# Altium PCB overlay dan masking.PcbDoc (part 2 of 3)
Units mil, origin at the board's own origin, x right, y up, seen from the top; angles counter-clockwise.
Board outline 6000 x 4000 mil, 2 copper layers (Top Layer, Bottom Layer); 120 components, 0 nets, 410 pads, 0 vias.
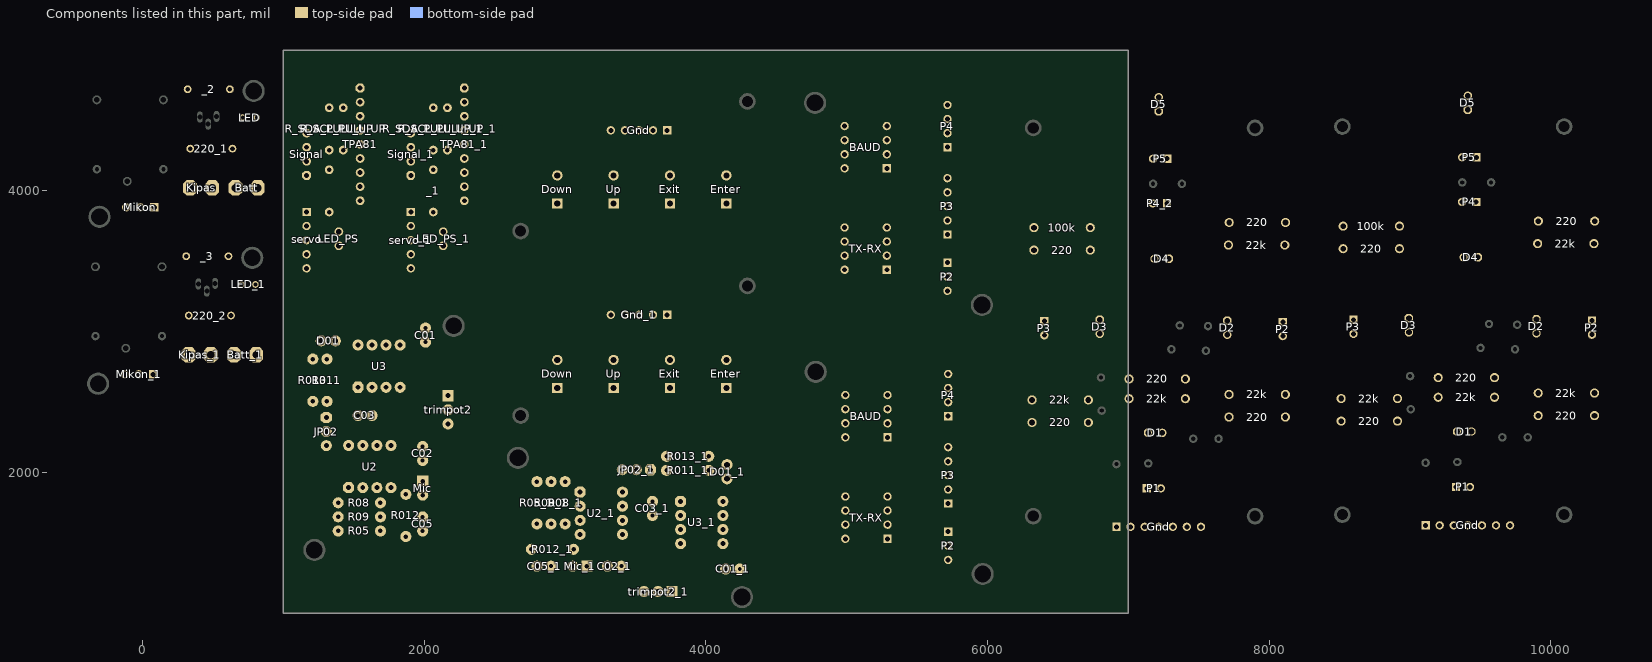
[diagram p2: the components of this part, seen from the top]

## Nets (pads, with @x,y where several pads share a name; then routed paths per layer and width w, separated by ;. In a path a pad name is that pad's centre, name@x,y a point inside that pad or via, vN(x,y) a via of type N, cw(c..) or ccw(c..) an arc to the next point about the centre after c; other vN are vias at no path point) (continued)
copper on no net: | length 228673.2
  Top Layer w19.68: 6784.97,2672.72 6805,2585.95 6825.03,2672.72 ; 6789.87,2441.14 6805,2529.68 ; 6790.75,2660.75 cw(c6756.34,2626.34) 6805,2626.34 cw(c6853.66,2626.34) 6819.25,2660.75 ; 6795.75,2454.25 ccw(c6773.41,2476.59) 6805,2476.59 ; 6805,2500.74 ccw(c6870.74,2500.74) 6824.25,2454.25 ; 6805,2675 6805,2455 6820,2440 ; 6810,2440 6805,2529.68 ; 6829.87,2443.37 6805,2529.68 ; 6915,2060 7135.43,2060 7140.43,2065 7051.01,2060 ; 6917.28,2039.97 7004.06,2060 6917.28,2080.03 ; 6929.25,2045.75 cw(c6963.66,2011.34) 6963.66,2060 cw(c6963.66,2108.67) 6929.25,2074.25 ; 7079.7,2060 ccw(c7079.7,2125.74) 7126.18,2079.25 ; 7103.84,2060 cw(c7103.84,2028.41) 7126.18,2050.75 ; 7137.05,2084.87 7051.01,2060 ; 7139.29,2044.88 7051.01,2060 ; 7175,4050 7380,4050 ; 7177.28,4029.97 7264.06,4050 7177.28,4070.03 ; 7189.25,4035.75 cw(c7223.66,4001.34) 7223.66,4050 cw(c7223.66,4098.67) 7189.25,4064.25 ; 7305,2875 7540,2875 7550,2865 7459.1,2875 ; 7307.28,2854.97 7394.06,2875 7307.28,2895.03 ; 7319.25,2860.75 cw(c7353.66,2826.34) 7353.66,2875 cw(c7353.66,2923.67) 7319.25,2889.25 ; 7365.75,4035.75 ccw(c7331.34,4001.34) 7331.34,4050 ccw(c7331.34,4098.67) 7365.75,4064.25 ; 7366.15,3024.88 7454.41,3040 ; 7368.38,3064.87 7454.41,3040 ; 7377.72,4029.97 7290.94,4050 7377.72,4070.03 ; 7379.25,3030.75 cw(c7401.59,3008.41) 7401.59,3040 ; 7379.25,3059.25 ccw(c7425.74,3105.74) 7425.74,3040 ; 7460,2240 7640,2240 ; 7462.28,2219.97 7549.06,2240 7462.28,2260.03 ; 7474.25,2225.75 cw(c7508.66,2191.34) 7508.66,2240 cw(c7508.66,2288.67) 7474.25,2254.25 ; 7477.19,2875 cw(c7477.19,2792.19) 7535.75,2850.75 ; 7545.6,2845.33 7459.1,2875 ; 7549.98,2885.16 7459.1,2875 ; 7550.75,3025.75 ccw(c7516.34,2991.34) 7516.34,3040 ccw(c7516.34,3088.67) 7550.75,3054.25 ; 7562.72,3019.97 7475.94,3040 7562.72,3060.03 ; 7565,3040 7370,3040 7365,3045 7454.41,3040 ; 7625.75,2225.75 ccw(c7591.34,2191.34) 7591.34,2240 ccw(c7591.34,2288.67) 7625.75,2254.25 ; 7637.72,2219.97 7550.94,2240 7637.72,2260.03 ; 8979.97,2682.72 9000,2595.95 9020.03,2682.72 ; 8984.87,2451.14 9000,2539.68 ; 8985.75,2670.75 cw(c8951.34,2636.34) 9000,2636.34 cw(c9048.66,2636.34) 9014.25,2670.75 ; 8990.75,2464.25 ccw(c8968.41,2486.59) 9000,2486.59 ; 9000,2510.74 ccw(c9065.74,2510.74) 9019.25,2464.25 ; 9000,2685 9000,2465 9015,2450 ; 9005,2450 9000,2539.68 ; 9024.87,2453.37 9000,2539.68 ; 9110,2070 9330.43,2070 9335.43,2075 9246.01,2070 ; 9112.28,2049.97 9199.06,2070 9112.28,2090.03 ; 9124.25,2055.75 cw(c9158.66,2021.34) 9158.66,2070 cw(c9158.66,2118.67) 9124.25,2084.25 ; 9274.7,2070 ccw(c9274.7,2135.74) 9321.18,2089.25 ; 9298.84,2070 cw(c9298.84,2038.41) 9321.18,2060.75 ; 9332.05,2094.87 9246.01,2070 ; 9334.29,2054.88 9246.01,2070 ; 9370,4060 9575,4060 ; 9372.28,4039.97 9459.06,4060 9372.28,4080.03 ; 9384.25,4045.75 cw(c9418.66,4011.34) 9418.66,4060 cw(c9418.66,4108.67) 9384.25,4074.25 ; 9500,2885 9735,2885 9745,2875 9654.1,2885 ; 9502.28,2864.97 9589.06,2885 9502.28,2905.03 ; 9514.25,2870.75 cw(c9548.66,2836.34) 9548.66,2885 cw(c9548.66,2933.67) 9514.25,2899.25 ; 9560.75,4045.75 ccw(c9526.34,4011.34) 9526.34,4060 ccw(c9526.34,4108.67) 9560.75,4074.25 ; 9561.15,3034.88 9649.41,3050 ; 9563.38,3074.87 9649.41,3050 ; 9572.72,4039.97 9485.94,4060 9572.72,4080.03 ; 9574.25,3040.75 cw(c9596.59,3018.41) 9596.59,3050 ; 9574.25,3069.25 ccw(c9620.74,3115.74) 9620.74,3050 ; 9655,2250 9835,2250 ; 9657.28,2229.97 9744.06,2250 9657.28,2270.03 ; 9669.25,2235.75 cw(c9703.66,2201.34) 9703.66,2250 cw(c9703.66,2298.67) 9669.25,2264.25 ; 9672.19,2885 cw(c9672.19,2802.19) 9730.75,2860.75 ; 9740.6,2855.33 9654.1,2885 ; 9744.98,2895.16 9654.1,2885 ; 9745.75,3035.75 ccw(c9711.34,3001.34) 9711.34,3050 ccw(c9711.34,3098.67) 9745.75,3064.25 ; 9757.72,3029.97 9670.94,3050 9757.72,3070.03 ; 9760,3050 9565,3050 9560,3055 9649.41,3050 ; 9820.75,2235.75 ccw(c9786.34,2201.34) 9786.34,2250 ccw(c9786.34,2298.67) 9820.75,2264.25 ; 9832.72,2229.97 9745.94,2250 9832.72,2270.03
  Bottom Layer w10: -352.17,2969.17 -334.06,2969.17 ; -342.17,4154.17 -324.06,4154.17
  Bottom Layer w19.68: 6293.02,2518.3 6315.5,2607.06 6337.98,2518.3 ; 6299.48,2531.52 ccw(c6260.8,2570.2) 6315.5,2570.2 ccw(c6370.2,2570.2) 6331.52,2531.52 ; 6301.3,2373.16 6389.76,2429.76 6333.16,2341.3 ; 6304.36,2535.23 6402.82,2577.82 ; 6307.02,3576.7 6329.5,3487.95 6351.98,3576.7 ; 6307.02,3582.3 6329.5,3671.06 6351.98,3582.3 ; 6307.02,3736.7 6329.5,3647.95 6351.98,3736.7 ; 6313.48,3563.48 cw(c6274.8,3524.8) 6329.5,3524.8 cw(c6384.2,3524.8) 6345.52,3563.48 ; 6313.48,3595.52 ccw(c6274.8,3634.2) 6329.5,3634.2 ccw(c6384.2,3634.2) 6345.52,3595.52 ; 6313.48,3723.48 cw(c6274.8,3684.8) 6329.5,3684.8 cw(c6384.2,3684.8) 6345.52,3723.48 ; 6315.5,2355.5 6550,2590 6885,2590 6885,2896.73 6796.73,2985 6781.73,2970 ; 6315.5,2378.16 ccw(c6315.5,2432.86) 6354.18,2394.18 ccw(c6392.86,2355.5) 6338.16,2355.5 ; 6315.5,2518.47 ccw(c6315.5,2586.01) 6363.25,2538.25 ; 6315.5,2538.16 ccw(c6315.5,2653.21) 6396.86,2571.86 ; 6329.5,3739.5 6329.5,3579.5 6329.5,2808.53 6247.57,2726.6 6247.57,2327.36 6287.36,2287.57 6343.64,2287.57 6411.57,2355.5 6715.5,2355.5 6715.5,2515.5 6812.28,2524.5 ; 6330.54,2498.55 6402.82,2577.82 ; 6383.47,2972.81 6403.03,2886.42 6422.59,2972.81 ; 6389.11,2961.08 cw(c6355.51,2927.48) 6403.03,2927.48 cw(c6450.56,2927.48) 6416.95,2961.08 ; 6403,3094.69 6493.69,3085 ; 6403.03,2975 6403.03,2818.03 6315.5,2730.5 6315.5,2515.5 ; 6407.29,3055.78 6493.69,3085 ; 6416.95,3061.08 cw(c6474.7,3003.34) 6474.7,3085 ; 6693.02,2358.3 6715.5,2447.06 6737.98,2358.3 ; 6693.02,2512.7 6715.5,2423.95 6737.98,2512.7 ; 6699.48,2339.48 ccw(c6660.8,2300.8) 6660.8,2355.5 ccw(c6660.8,2410.2) 6699.48,2371.52 ccw(c6660.8,2410.2) 6715.5,2410.2 ccw(c6770.2,2410.2) 6731.52,2371.52 ; 6699.48,2499.48 cw(c6660.8,2460.8) 6715.5,2460.8 cw(c6770.2,2460.8) 6731.52,2499.48 cw(c6791.93,2439.07) 6791.93,2524.5 ; 6712.7,2333.02 6623.94,2355.5 6712.7,2377.98 ; 6716.05,2538.15 6812.28,2524.5 ; 6720.21,2493.34 6812.28,2524.5 ; 6725.5,2505.5 6744.5,2524.5 7004.5,2524.5 ; 6729.5,3739.5 7089.5,3739.5 7173.54,3823.54 ; 6731.52,2531.52 ccw(c6748.47,2548.47) 6748.47,2524.5 ; 6732.3,3557.02 6821.06,3579.5 6732.3,3601.98 ; 6732.3,3717.02 6821.06,3739.5 6732.3,3761.98 ; 6745.52,3563.48 cw(c6784.2,3524.8) 6784.2,3579.5 cw(c6784.2,3634.2) 6745.52,3595.52 ; 6745.52,3723.48 cw(c6784.2,3684.8) 6784.2,3739.5 cw(c6784.2,3794.2) 6745.52,3755.52 ; 6746.44,3562.56 6729.5,3579.5 7123.49,3579.5 ; 6782.48,3070.75 ccw(c6748.07,3036.34) 6748.07,3085 ccw(c6748.07,3133.67) 6782.48,3099.25 ; 6783.96,2969.4 6868.49,2913.24 6812.33,2997.77 ; 6790.34,2435.56 6820,2349.92 ; 6790.75,2660.75 ccw(c6756.34,2626.34) 6756.34,2675 ccw(c6756.34,2723.67) 6790.75,2689.25 ; 6794.45,3064.97 6707.68,3085 6794.45,3105.03 ; 6795.75,2425.75 cw(c6737.19,2367.19) 6820,2367.19 ; 6796.73,2964.84 cw(c6796.73,2916.18) 6831.14,2950.59 cw(c6865.55,2985) 6816.89,2985 ; 6799.01,3064.97 6885.79,3085 6799.01,3105.03 ; 6802.72,2654.97 6715.94,2675 ; 6802.72,2695.03 6715.94,2675 ; 6805,2675 6715.94,2675 ; 6810,2440 6820,2349.92 ; 6810.99,3070.75 cw(c6845.4,3036.34) 6845.4,3085 cw(c6845.4,3133.67) 6810.99,3099.25 ; 6820,2455 6820,1560 6910,1470 7170,1470 7315,1615 7310,1615 ; 6820,2675 6500,2675 6340.5,2515.5 6315.5,2515.5 ; 6830.16,2439.98 6820,2349.92 ; 6894.97,2057.72 6915,1970.95 6935.03,2057.72 ; 6895.44,1617.19 6915,1703.58 6934.56,1617.19 ; 6900.75,2045.75 cw(c6866.34,2011.34) 6915,2011.34 cw(c6963.66,2011.34) 6929.25,2045.75 ; 6901.08,1628.92 ccw(c6867.48,1662.53) 6915,1662.53 ccw(c6962.52,1662.53) 6928.92,1628.92 ; 6905,2070 6915,2060 6915,1615 ; 6982.02,2521.7 7004.5,2432.95 7026.98,2521.7 ; 6982.02,2527.3 7004.5,2616.06 7026.98,2527.3 ; 6982.02,2661.7 7004.5,2572.95 7026.98,2661.7 ; 6988.48,2648.48 cw(c6949.8,2609.8) 7004.5,2609.8 cw(c7059.2,2609.8) 7020.52,2648.48 ; 6990.3,2682.16 7078.76,2738.76 7022.16,2650.3 ; 6995.32,1614.86 7004.5,1705.36 ; 7001.7,2502.02 6912.94,2524.5 7001.7,2546.98 ; 7004.5,1687.87 ccw(c7087.87,1687.87) 7028.92,1628.92 ; 7004.5,2687.16 ccw(c7004.5,2741.86) 7043.18,2703.18 ccw(c7081.86,2664.5) 7027.16,2664.5 ; 7020.52,2508.48 ccw(c7059.2,2469.8) 7004.5,2469.8 ccw(c6949.8,2469.8) 6988.48,2508.48 ccw(c6949.8,2469.8) 6949.8,2524.5 ccw(c6949.8,2579.2) 6988.48,2540.52 ccw(c6949.8,2579.2) 7004.5,2579.2 ccw(c7059.2,2579.2) 7020.52,2540.52 ; 7034.19,1619.38 7004.5,1705.36 ; 7095.66,1618.66 7121.84,1704.25 ; 7101.08,1628.92 ccw(c7050.96,1679.04) 7121.84,1679.04 ; 7111.21,1892.01 7140.43,1978.42 ; 7115.05,4004.95 cw(c7021.36,3911.26) 7153.86,3911.26 ; 7116.51,1901.68 ccw(c7058.77,1959.42) 7140.43,1959.42 ; 7120.41,2062.72 7140.43,1975.95 7160.46,2062.72 ; 7120.41,2067.28 7140.43,2154.06 7160.46,2067.28 ; 7120.41,2279.18 7140.43,2192.4 7160.46,2279.18 ; 7121.84,1646.01 ccw(c7146.01,1646.01) 7128.92,1628.92 ; 7126.18,2050.75 cw(c7091.77,2016.34) 7140.43,2016.34 cw(c7189.1,2016.34) 7154.69,2050.75 ; 7126.18,2079.25 ccw(c7091.77,2113.67) 7140.43,2113.67 ccw(c7189.1,2113.67) 7154.69,2079.25 ; 7126.18,2267.2 cw(c7091.77,2232.79) 7140.43,2232.79 cw(c7189.1,2232.79) 7154.69,2267.2 ; 7134.67,1615.66 7121.84,1704.25 ; 7140.43,2301.62 ccw(c7140.43,2350.28) 7174.84,2315.87 ccw(c7209.26,2281.46) 7160.59,2281.46 ; 7140.43,3045 7010,3045 6970,3085 6796.73,3085 6413.03,3085 6403.03,3075 6493.69,3085 ; 7148.66,3971.35 cw(c7088.57,3911.26) 7173.54,3911.26 ; 7150.12,1887.72 7140.43,1978.42 ; 7153.98,3909.05 7173.54,3823.54 ; 7154.97,4052.28 7175,4139.06 ; 7155,3045 7365,3045 ; 7155.44,4226.48 7175,4140.08 ; 7155.8,3902.73 7119.91,4000.09 ; 7159.62,3897.34 cw(c7126.02,3863.74) 7173.54,3863.74 cw(c7221.07,3863.74) 7187.46,3897.34 ; 7160.75,4064.25 ccw(c7126.34,4098.67) 7175,4098.67 ccw(c7223.66,4098.67) 7189.25,4064.25 ; 7161.08,4214.74 cw(c7127.48,4181.14) 7175,4181.14 cw(c7222.52,4181.14) 7188.92,4214.74 ; 7163.24,3928.03 ccw(c7151.92,3946.46) 7173.54,3946.46 ; 7165,4050 7175,4060 7175,4228.66 7175,4140.08 ; 7165.28,3517.56 ccw(c7116.61,3517.56) 7151.02,3551.97 ccw(c7185.43,3586.38) 7185.43,3537.72 ; 7169.63,3505.04 7123.49,3579.5 ; 7175,4050 7175,4139.06 ; 7183.85,3928.03 cw(c7195.16,3946.46) 7173.54,3946.46 ; 7185.43,3517.56 7123.49,3579.5 ; 7189.35,3922.99 7119.91,4000.09 ; 7190.35,1838.51 ccw(c7141.1,1887.76) 7210.75,1887.76 ; 7193.1,3909.05 7173.54,3823.54 ; 7194.56,4226.48 7175,4140.08 ; 7194.97,4562.72 7215,4475.95 ; 7195.03,4052.28 7175,4139.06 ; 7197.95,3533.36 7123.49,3579.5 ; 7200.75,4550.75 cw(c7166.34,4516.34) 7215,4516.34 cw(c7263.66,4516.34) 7229.25,4550.75 ; 7210.87,1889.94 7230.43,1976.34 7250,1889.94 ; 7212.47,1860.63 cw(c7230.43,1842.67) 7230.43,1868.07 ; 7215,1615 7300,1700 7300,2090 7455,2245 ; 7215,1634.69 ccw(c7215,1682.21) 7248.6,1648.61 ccw(c7282.21,1615) 7234.69,1615 ; 7215,4644.84 cw(c7215,4607.99) 7241.06,4634.05 ; 7215,4665 7215,4660.11 7715.5,4159.61 7715.5,3775.5 ; 7216.51,1901.68 ccw(c7182.91,1935.28) 7230.43,1935.28 ccw(c7277.96,1935.28) 7244.35,1901.68 ; 7222.51,2290.69 7255.28,2332.27 ; 7229.91,2298.65 ccw(c7218.42,2317.43) 7240.43,2317.43 ; 7235.03,4562.72 7215,4475.95 ; 7235.16,4665 ccw(c7295.63,4665) 7252.87,4622.24 ; 7240.8,2281.75 cw(c7263.12,2299.65) 7242.89,2319.88 ; 7240.88,2281.62 cw(c7282.9,2296.74) 7251.32,2328.32 ; 7250.96,2298.65 cw(c7262.45,2317.43) 7240.43,2317.43 ; 7254.42,3906.61 7285.43,3820.7 ; 7254.42,3915.91 7285.43,4001.76 ; 7255.76,4232.84 7275,4275 ; 7255.81,4224.28 7285.43,4138.86 ; 7256.16,2294.07 cw(c7280.35,2313.48) 7258.42,2335.41 ; 7259.62,3897.34 cw(c7197.31,3835.03) 7285.43,3835.03 ; 7259.62,3925.18 ccw(c7197.31,3987.49) 7285.43,3987.49 ; 7260.5,2279.59 7255.28,2332.27 ; 7261.08,4214.74 cw(c7202.29,4155.95) 7285.43,4155.95 ; 7261.33,4242.83 ccw(c7230.31,4275) 7275,4275 ; 7265.41,3515.28 7285.43,3428.51 7305.46,3515.28 ; 7265.41,3519.84 7285.43,3606.62 7305.46,3519.84 ; 7265.43,3921.89 7273.54,3930 ; 7271.18,3503.31 cw(c7236.77,3468.9) 7285.43,3468.9 cw(c7334.1,3468.9) 7299.69,3503.31 ; 7271.18,3531.81 ccw(c7236.77,3566.22) 7285.43,3566.22 ccw(c7334.1,3566.22) 7299.69,3531.81 ; 7285.43,3882.56 ccw(c7244.84,3882.56) 7273.54,3911.26 ; 7285.43,3939.97 cw(c7244.84,3939.97) 7273.54,3911.26 ; 7285.43,4239.57 7285.43,3517.56 7285.43,3124.57 7365,3045 ; 7288.67,4242.83 cw(c7319.69,4275) 7275,4275 ; 7290.75,2860.75 ccw(c7256.34,2826.34) 7256.34,2875 ccw(c7256.34,2923.67) 7290.75,2889.25 ; 7293.22,3910.82 7285.43,4001.76 ; 7293.22,3911.71 7285.43,3820.7 ; 7294.24,4232.84 7275,4275 ; 7294.68,4228.79 7285.43,4138.86 ; 7295.31,1615 cw(c7247.79,1615) 7281.4,1581.4 cw(c7315,1547.79) 7315,1595.32 ; 7302.72,2854.97 7215.94,2875 7302.72,2895.03 ; 7305,2875 7215,2875 7004.5,2664.5 7004.5,2524.5 ; 7344.84,3045 ccw(c7296.18,3045) 7330.59,3079.41 ccw(c7365,3113.82) 7365,3065.16 ; 7349.4,3032.23 7293.24,3116.76 7377.77,3060.6 ; 7350.62,3030.87 7400,2995 ; 7350.75,3030.75 ccw(c7316.34,2996.34) 7316.34,3045 ccw(c7316.34,3093.67) 7350.75,3059.25 ; 7360,4050 7600,4050 7650,4000 7650,3806.07 7647.57,3803.64 7647.57,3678.43 ; 7362.72,3024.97 7275.94,3045 7362.72,3065.03 ; 7375,3020 7400,2995 ; 7380,3050 7375,3055 7365,3045 ; 7380,4050 7469.06,4050 ; 7381.84,2664.5 cw(c7327.14,2664.5) 7365.82,2625.82 cw(c7404.5,2587.14) 7404.5,2641.84 ; 7382.02,2521.7 7404.5,2432.95 ; 7382.28,4029.97 7469.06,4050 ; 7382.28,4070.03 7469.06,4050 ; 7383.2,3053.68 7400,2995 ; 7386.84,2678.7 7330.24,2590.24 ; 7388.48,2508.48 cw(c7349.8,2469.8) 7404.5,2469.8 cw(c7459.2,2469.8) 7420.52,2508.48 ; 7394.25,4035.75 cw(c7428.66,4001.34) 7428.66,4050 cw(c7428.66,4098.67) 7394.25,4064.25 ; 7408.52,2198.52 cw(c7460,2147.04) 7460,2219.84 ; 7415,1595.32 cw(c7415,1528.16) 7462.49,1575.65 ; 7415,1615 7423.13,1615 7488.09,1550.04 7541.91,1550.04 7579.96,1588.09 7579.96,1641.91 7575.28,1646.59 7575.28,2060 7710,2194.73 8083.75,2194.73 8227.71,2338.68 8227.71,2441.39 8182.43,2486.67 8182.43,3539.23 8183.43,3540.23 8183.43,3803.64 8143.64,3843.43 7851.57,3843.43 7760.78,3934.23 7760.78,4211.76 7242.1,4730.43 7149.57,4730.43 7064.13,4645 7064.13,4055.87 7173.54,3946.46 ; 7418.7,2646.85 7330.24,2590.24 ; 7426.98,2521.7 7404.5,2432.95 ; 7432.66,2222.66 ccw(c7415.32,2240) 7439.84,2240 ; 7434.69,1615 ccw(c7462.58,1615) 7442.85,1595.28 ; 7445.33,2253.82 7383.9,2173.9 ; 7460,2240 7383.9,2173.9 ; 7471.63,2223.54 7383.9,2173.9 ; 7490.55,2929.45 7490.55,3032.51 7490.28,3032.78 7490.28,3060.28 7730,3300 7950,3300 8110.5,3460.5 8110.5,3615.5 ; 7501.08,1628.92 ccw(c7431.26,1698.74) 7530,1698.74 ; 7529.84,2865 ccw(c7481.18,2865) 7515.59,2899.41 ccw(c7550,2933.82) 7550,2885.16 ; 7530,1651.21 cw(c7478.79,1651.21) 7515,1615 7530,1630 7530,2635.07 7445,2720.07 7445,2790.97 7445.28,2791.25 7445.28,3013.76 7445,3014.03 7445,3085 7710.5,3350.5 7710.5,3615.5 7647.57,3678.43 ; 7534.14,2852.56 7490.55,2924.45 ; 7537.23,2849.4 7621.76,2793.24 7565.6,2877.77 ; 7550,2844.84 cw(c7550,2796.18) 7584.41,2830.59 cw(c7618.82,2865) 7570.16,2865 ; 7551.67,3055.13 7593.86,3078.86 ; 7560,3045 7593.86,3078.86 ; 7562.44,2880.86 7490.55,2924.45 ; 7565,3040 7593.86,3078.86 ; 7565,3060.16 ccw(c7565,3084.68) 7582.34,3067.34 ; 7583.33,3031.62 7593.86,3078.86 ; 7584.97,3042.71 cw(c7633.44,3049.28) 7598.86,3083.86 ; 7640,2240 8065,2240 8182.43,2357.43 8182.43,2422.64 8114.5,2490.57 ; 7654.25,2225.75 cw(c7688.66,2191.34) 7688.66,2240 cw(c7688.66,2288.67) 7654.25,2254.25 ; 7687.84,3615.5 ccw(c7633.14,3615.5) 7671.82,3654.18 ccw(c7710.5,3692.86) 7710.5,3638.16 ; 7687.99,3064.61 ccw(c7653.58,3030.2) 7653.58,3078.86 ccw(c7653.58,3127.52) 7687.99,3093.11 ; 7688.02,3612.7 7710.5,3523.95 7732.98,3612.7 ; 7692.02,2397.3 7714.5,2486.06 7736.98,2397.3 ; 7692.02,2551.7 7714.5,2462.95 7736.98,2551.7 ; 7692.02,2557.3 7714.5,2646.06 7736.98,2557.3 ; 7692.57,3601.65 7647.57,3678.43 ; 7693.02,3778.3 7715.5,3867.06 7737.98,3778.3 ; 7694.48,3599.48 cw(c7655.8,3560.8) 7710.5,3560.8 cw(c7765.2,3560.8) 7726.52,3599.48 ; 7698.48,2410.52 ccw(c7659.8,2449.2) 7714.5,2449.2 ccw(c7769.2,2449.2) 7730.52,2410.52 ; 7698.48,2538.48 cw(c7659.8,2499.8) 7714.5,2499.8 cw(c7769.2,2499.8) 7730.52,2538.48 ; 7698.48,2570.52 ccw(c7659.8,2609.2) 7714.5,2609.2 ccw(c7769.2,2609.2) 7730.52,2570.52 ; 7699.48,3791.52 ccw(c7660.8,3830.2) 7715.5,3830.2 ccw(c7770.2,3830.2) 7731.52,3791.52 ; 7699.96,3058.83 7613.19,3078.86 7699.96,3098.89 ; 7702.24,2978.86 7941.14,2978.86 7959,2961 7959,2550 8114.5,2394.5 ; 7702.26,3058.7 7793.33,3068.86 ; 7704.53,2958.83 7791.3,2978.86 7704.53,2998.89 ; 7706.63,3098.53 7793.33,3068.86 ; 7714.5,2394.5 7714.5,2554.5 7714.5,2700.5 7550,2865 7490.55,2924.45 ; 7716.5,2964.61 cw(c7750.91,2930.2) 7750.91,2978.86 cw(c7750.91,3027.52) 7716.5,2993.11 ; 7716.5,3093.11 ccw(c7775.05,3151.67) 7775.05,3068.86 ; 7724.35,3633.43 7647.57,3678.43 ; 8077.06,2963.31 8114.5,2870.82 ; 8082.03,2954.94 cw(c8003.63,2876.54) 8114.5,2876.54 ; 8082.03,3054.94 ccw(c8048.42,3021.34) 8048.42,3068.86 ccw(c8048.42,3116.38) 8082.03,3082.78 ; 8088.02,3612.7 8110.5,3523.95 8132.98,3612.7 ; 8088.2,3619.51 8115.5,3707.34 ; 8091.84,2394.5 ccw(c8037.14,2394.5) 8075.82,2433.18 ccw(c8114.5,2471.86) 8114.5,2417.16 ; 8092.02,2557.3 8114.5,2646.06 8136.98,2557.3 ; 8092.2,2550.49 8114.5,2490.57 ; 8093.02,3772.7 8115.5,3683.95 ; 8093.76,3049.3 8007.36,3068.86 8093.76,3088.42 ; 8094.48,3599.48 cw(c8055.8,3560.8) 8110.5,3560.8 cw(c8165.2,3560.8) 8126.52,3599.48 ; 8094.48,3631.52 ccw(c8043.73,3682.27) 8115.5,3682.27 ; 8095.94,3068.86 7712.24,3068.86 7702.24,3078.86 ; 8096.84,2380.3 8040.24,2468.76 8128.7,2412.16 ; 8098.48,2538.48 cw(c8059.8,2499.8) 8114.5,2499.8 cw(c8169.2,2499.8) 8130.52,2538.48 ; 8098.48,2570.52 ccw(c8059.8,2609.2) 8114.5,2609.2 ccw(c8169.2,2609.2) 8130.52,2570.52 ; 8099.48,3759.48 cw(c8060.8,3720.8) 8115.5,3720.8 cw(c8170.2,3720.8) 8131.52,3759.48 ; 8114.5,2924.06 ccw(c8051.15,2924.06) 8095.94,2968.86 ; 8115.5,3658.13 ccw(c8153.13,3658.13) 8126.52,3631.52 ; 8115.55,2970.59 8114.5,2870.82 ; 8133.1,3617.07 8115.5,3707.34 ; 8136.8,2550.49 8114.5,2490.57 ; 8137.98,3772.7 8115.5,3683.95 ; 8488.02,2528.3 8510.5,2617.06 8532.98,2528.3 ; 8494.48,2541.52 ccw(c8455.8,2580.2) 8510.5,2580.2 ccw(c8565.2,2580.2) 8526.52,2541.52 ; 8496.3,2383.16 8584.76,2439.76 8528.16,2351.3 ; 8499.36,2545.23 8597.82,2587.82 ; 8502.02,3586.7 8524.5,3497.95 8546.98,3586.7 ; 8502.02,3592.3 8524.5,3681.06 8546.98,3592.3 ; 8502.02,3746.7 8524.5,3657.95 8546.98,3746.7 ; 8508.48,3573.48 cw(c8469.8,3534.8) 8524.5,3534.8 cw(c8579.2,3534.8) 8540.52,3573.48 ; 8508.48,3605.52 ccw(c8469.8,3644.2) 8524.5,3644.2 ccw(c8579.2,3644.2) 8540.52,3605.52 ; 8508.48,3733.48 cw(c8469.8,3694.8) 8524.5,3694.8 cw(c8579.2,3694.8) 8540.52,3733.48 ; 8510.5,2365.5 8745,2600 9080,2600 9080,2906.73 8991.73,2995 8976.73,2980 ; 8510.5,2388.16 ccw(c8510.5,2442.86) 8549.18,2404.18 ccw(c8587.86,2365.5) 8533.16,2365.5 ; 8510.5,2528.47 ccw(c8510.5,2596.01) 8558.25,2548.25 ; 8510.5,2548.16 ccw(c8510.5,2663.21) 8591.86,2581.86 ; 8524.5,3749.5 8524.5,3589.5 8524.5,2818.53 8442.57,2736.6 8442.57,2337.36 8482.36,2297.57 8538.64,2297.57 8606.57,2365.5 8910.5,2365.5 8910.5,2525.5 9007.28,2534.5 ; 8525.54,2508.55 8597.82,2587.82 ; 8578.47,2982.81 8598.03,2896.42 8617.59,2982.81 ; 8584.11,2971.08 cw(c8550.51,2937.48) 8598.03,2937.48 cw(c8645.56,2937.48) 8611.95,2971.08 ; 8598,3104.69 8688.69,3095 ; 8598.03,2985 8598.03,2828.03 8510.5,2740.5 8510.5,2525.5 ; 8602.29,3065.78 8688.69,3095 ; 8611.95,3071.08 cw(c8669.7,3013.34) 8669.7,3095 ; 8888.02,2368.3 8910.5,2457.06 8932.98,2368.3 ; 8888.02,2522.7 8910.5,2433.95 8932.98,2522.7 ; 8894.48,2349.48 ccw(c8855.8,2310.8) 8855.8,2365.5 ccw(c8855.8,2420.2) 8894.48,2381.52 ccw(c8855.8,2420.2) 8910.5,2420.2 ccw(c8965.2,2420.2) 8926.52,2381.52 ; 8894.48,2509.48 cw(c8855.8,2470.8) 8910.5,2470.8 cw(c8965.2,2470.8) 8926.52,2509.48 cw(c8986.93,2449.07) 8986.93,2534.5 ; 8907.7,2343.02 8818.94,2365.5 8907.7,2387.98 ; 8911.05,2548.15 9007.28,2534.5 ; 8915.21,2503.34 9007.28,2534.5 ; 8920.5,2515.5 8939.5,2534.5 9199.5,2534.5 ; 8924.5,3749.5 9284.5,3749.5 9368.54,3833.54 ; 8926.52,2541.52 ccw(c8943.47,2558.47) 8943.47,2534.5 ; 8927.3,3567.02 9016.06,3589.5 8927.3,3611.98 ; 8927.3,3727.02 9016.06,3749.5 8927.3,3771.98 ; 8940.52,3573.48 cw(c8979.2,3534.8) 8979.2,3589.5 cw(c8979.2,3644.2) 8940.52,3605.52 ; 8940.52,3733.48 cw(c8979.2,3694.8) 8979.2,3749.5 cw(c8979.2,3804.2) 8940.52,3765.52 ; 8941.44,3572.56 8924.5,3589.5 9318.49,3589.5 ; 8977.48,3080.75 ccw(c8943.07,3046.34) 8943.07,3095 ccw(c8943.07,3143.67) 8977.48,3109.25 ; 8978.96,2979.4 9063.49,2923.24 9007.33,3007.77 ; 8985.34,2445.56 9015,2359.92 ; 8985.75,2670.75 ccw(c8951.34,2636.34) 8951.34,2685 ccw(c8951.34,2733.67) 8985.75,2699.25 ; 8989.45,3074.97 8902.68,3095 8989.45,3115.03 ; 8990.75,2435.75 cw(c8932.19,2377.19) 9015,2377.19 ; 8991.73,2974.84 cw(c8991.73,2926.18) 9026.14,2960.59 cw(c9060.55,2995) 9011.89,2995 ; 8994.01,3074.97 9080.79,3095 8994.01,3115.03 ; 8997.72,2664.97 8910.94,2685 ; 8997.72,2705.03 8910.94,2685 ; 9000,2685 8910.94,2685 ; 9005,2450 9015,2359.92 ; 9005.99,3080.75 cw(c9040.4,3046.34) 9040.4,3095 cw(c9040.4,3143.67) 9005.99,3109.25 ; 9015,2465 9015,1570 9105,1480 9365,1480 9510,1625 9505,1625 ; 9015,2685 8695,2685 8535.5,2525.5 8510.5,2525.5 ; 9025.16,2449.98 9015,2359.92 ; 9089.97,2067.72 9110,1980.95 9130.03,2067.72 ; 9090.44,1627.19 9110,1713.58 9129.56,1627.19 ; 9095.75,2055.75 cw(c9061.34,2021.34) 9110,2021.34 cw(c9158.66,2021.34) 9124.25,2055.75 ; 9096.08,1638.92 ccw(c9062.48,1672.53) 9110,1672.53 ccw(c9157.52,1672.53) 9123.92,1638.92 ; 9100,2080 9110,2070 9110,1625 ; 9177.02,2531.7 9199.5,2442.95 9221.98,2531.7 ; 9177.02,2537.3 9199.5,2626.06 9221.98,2537.3 ; 9177.02,2671.7 9199.5,2582.95 9221.98,2671.7 ; 9183.48,2658.48 cw(c9144.8,2619.8) 9199.5,2619.8 cw(c9254.2,2619.8) 9215.52,2658.48 ; 9185.3,2692.16 9273.76,2748.76 9217.16,2660.3 ; 9190.32,1624.86 9199.5,1715.36 ; 9196.7,2512.02 9107.94,2534.5 9196.7,2556.98 ; 9199.5,1697.87 ccw(c9282.87,1697.87) 9223.92,1638.92 ; 9199.5,2697.16 ccw(c9199.5,2751.86) 9238.18,2713.18 ccw(c9276.86,2674.5) 9222.16,2674.5 ; 9215.52,2518.48 ccw(c9254.2,2479.8) 9199.5,2479.8 ccw(c9144.8,2479.8) 9183.48,2518.48 ccw(c9144.8,2479.8) 9144.8,2534.5 ccw(c9144.8,2589.2) 9183.48,2550.52 ccw(c9144.8,2589.2) 9199.5,2589.2 ccw(c9254.2,2589.2) 9215.52,2550.52 ; 9229.19,1629.38 9199.5,1715.36 ; 9290.66,1628.66 9316.84,1714.25 ; 9296.08,1638.92 ccw(c9245.96,1689.04) 9316.84,1689.04 ; 9306.21,1902.01 9335.43,1988.42 ; 9310.05,4014.95 cw(c9216.36,3921.26) 9348.86,3921.26 ; 9311.51,1911.68 ccw(c9253.77,1969.42) 9335.43,1969.42 ; 9315.41,2072.72 9335.43,1985.95 9355.46,2072.72 ; 9315.41,2077.28 9335.43,2164.06 9355.46,2077.28 ; 9315.41,2289.18 9335.43,2202.4 9355.46,2289.18 ; 9316.84,1656.01 ccw(c9341,1656.01) 9323.92,1638.92 ; 9321.18,2060.75 cw(c9286.77,2026.34) 9335.43,2026.34 cw(c9384.1,2026.34) 9349.69,2060.75 ; 9321.18,2089.25 ccw(c9286.77,2123.67) 9335.43,2123.67 ccw(c9384.1,2123.67) 9349.69,2089.25 ; 9321.18,2277.2 cw(c9286.77,2242.79) 9335.43,2242.79 cw(c9384.1,2242.79) 9349.69,2277.2 ; 9329.67,1625.66 9316.84,1714.25 ; 9335.43,2311.62 ccw(c9335.43,2360.28) 9369.84,2325.87 ccw(c9404.26,2291.46) 9355.59,2291.46 ; 9335.43,3055 9205,3055 9165,3095 8991.73,3095 8608.03,3095 8598.03,3085 8688.69,3095 ; 9343.66,3981.35 cw(c9283.57,3921.26) 9368.54,3921.26 ; 9345.12,1897.72 9335.43,1988.42 ; 9348.98,3919.05 9368.54,3833.54 ; 9349.97,4062.28 9370,4149.06 ; 9350,3055 9560,3055 ; 9350.44,4236.48 9370,4150.08 ; 9350.8,3912.73 9314.91,4010.09 ; 9354.62,3907.34 cw(c9321.02,3873.74) 9368.54,3873.74 cw(c9416.07,3873.74) 9382.46,3907.34 ; 9355.75,4074.25 ccw(c9321.34,4108.67) 9370,4108.67 ccw(c9418.66,4108.67) 9384.25,4074.25 ; 9356.08,4224.74 cw(c9322.48,4191.14) 9370,4191.14 cw(c9417.52,4191.14) 9383.92,4224.74 ; 9358.24,3938.03 ccw(c9346.92,3956.46) 9368.54,3956.46 ; 9360,4060 9370,4070 9370,4238.66 9370,4150.08 ; 9360.28,3527.56 ccw(c9311.61,3527.56) 9346.02,3561.97 ccw(c9380.43,3596.38) 9380.43,3547.72 ; 9364.63,3515.04 9318.49,3589.5 ; 9370,4060 9370,4149.06 ; 9378.85,3938.03 cw(c9390.16,3956.46) 9368.54,3956.46 ; 9380.43,3527.56 9318.49,3589.5 ; 9384.35,3932.99 9314.91,4010.09 ; 9385.35,1848.51 ccw(c9336.1,1897.76) 9405.75,1897.76 ; 9388.1,3919.05 9368.54,3833.54 ; 9389.56,4236.48 9370,4150.08 ; 9389.97,4572.72 9410,4485.95 ; 9390.03,4062.28 9370,4149.06 ; 9392.95,3543.36 9318.49,3589.5 ; 9395.75,4560.75 cw(c9361.34,4526.34) 9410,4526.34 cw(c9458.66,4526.34) 9424.25,4560.75 ; 9405.87,1899.94 9425.43,1986.34 9445,1899.94 ; 9407.47,1870.63 cw(c9425.43,1852.67) 9425.43,1878.07 ; 9410,1625 9495,1710 9495,2100 9650,2255 ; 9410,1644.69 ccw(c9410,1692.21) 9443.6,1658.61 ccw(c9477.21,1625) 9429.68,1625 ; 9410,4654.84 cw(c9410,4617.99) 9436.06,4644.05 ; 9410,4675 9410,4670.11 9910.5,4169.61 9910.5,3785.5 ; 9411.51,1911.68 ccw(c9377.91,1945.28) 9425.43,1945.28 ccw(c9472.96,1945.28) 9439.35,1911.68 ; 9417.51,2300.69 9450.28,2342.27 ; 9424.91,2308.65 ccw(c9413.42,2327.43) 9435.43,2327.43 ; 9430.03,4572.72 9410,4485.95 ; 9430.16,4675 ccw(c9490.63,4675) 9447.87,4632.24 ; 9435.8,2291.75 cw(c9458.12,2309.65) 9437.89,2329.88 ; 9435.88,2291.62 cw(c9477.9,2306.74) 9446.32,2338.32 ; 9445.96,2308.65 cw(c9457.45,2327.43) 9435.43,2327.43 ; 9449.42,3916.61 9480.43,3830.7 ; 9449.42,3925.91 9480.43,4011.76 ; 9450.76,4242.84 9470,4285 ; 9450.81,4234.28 9480.43,4148.86 ; 9451.16,2304.07 cw(c9475.35,2323.48) 9453.42,2345.41 ; 9454.62,3907.34 cw(c9392.32,3845.03) 9480.43,3845.03 ; 9454.62,3935.18 ccw(c9392.32,3997.49) 9480.43,3997.49 ; 9455.5,2289.59 9450.28,2342.27 ; 9456.08,4224.74 cw(c9397.29,4165.95) 9480.43,4165.95 ; 9456.33,4252.83 ccw(c9425.31,4285) 9470,4285 ; 9460.41,3525.28 9480.43,3438.51 9500.46,3525.28 ; 9460.41,3529.84 9480.43,3616.62 9500.46,3529.84 ; 9460.43,3931.89 9468.54,3940 ; 9466.18,3513.31 cw(c9431.77,3478.9) 9480.43,3478.9 cw(c9529.1,3478.9) 9494.69,3513.31 ; 9466.18,3541.81 ccw(c9431.77,3576.22) 9480.43,3576.22 ccw(c9529.1,3576.22) 9494.69,3541.81 ; 9480.43,3892.56 ccw(c9439.84,3892.56) 9468.54,3921.26 ; 9480.43,3949.97 cw(c9439.84,3949.97) 9468.54,3921.26 ; 9480.43,4249.57 9480.43,3527.56 9480.43,3134.57 9560,3055 ; 9483.67,4252.83 cw(c9514.69,4285) 9470,4285 ; 9485.75,2870.75 ccw(c9451.34,2836.34) 9451.34,2885 ccw(c9451.34,2933.67) 9485.75,2899.25 ; 9488.22,3920.82 9480.43,4011.76 ; 9488.22,3921.71 9480.43,3830.7 ; 9489.24,4242.84 9470,4285 ; 9489.68,4238.79 9480.43,4148.86 ; 9490.32,1625 cw(c9442.79,1625) 9476.4,1591.4 cw(c9510,1557.79) 9510,1605.32 ; 9497.72,2864.97 9410.94,2885 9497.72,2905.03 ; 9500,2885 9410,2885 9199.5,2674.5 9199.5,2534.5 ; 9539.84,3055 ccw(c9491.18,3055) 9525.59,3089.41 ccw(c9560,3123.82) 9560,3075.16 ; 9544.4,3042.23 9488.24,3126.76 9572.77,3070.6 ; 9545.62,3040.87 9595,3005 ; 9545.75,3040.75 ccw(c9511.34,3006.34) 9511.34,3055 ccw(c9511.34,3103.67) 9545.75,3069.25 ; 9555,4060 9795,4060 9845,4010 9845,3816.07 9842.57,3813.64 9842.57,3688.43 ; 9557.72,3034.97 9470.94,3055 9557.72,3075.03 ; 9570,3030 9595,3005 ; 9575,3060 9570,3065 9560,3055 ; 9575,4060 9664.06,4060 ; 9576.84,2674.5 cw(c9522.14,2674.5) 9560.82,2635.82 cw(c9599.5,2597.14) 9599.5,2651.84 ; 9577.02,2531.7 9599.5,2442.95 ; 9577.28,4039.97 9664.06,4060 ; 9577.28,4080.03 9664.06,4060 ; 9578.2,3063.68 9595,3005 ; 9581.84,2688.7 9525.24,2600.24 ; 9583.48,2518.48 cw(c9544.8,2479.8) 9599.5,2479.8 cw(c9654.2,2479.8) 9615.52,2518.48 ; 9589.25,4045.75 cw(c9623.66,4011.34) 9623.66,4060 cw(c9623.66,4108.67) 9589.25,4074.25 ; 9603.52,2208.52 cw(c9655,2157.04) 9655,2229.84 ; 9610,1605.32 cw(c9610,1538.16) 9657.49,1585.65 ; 9610,1625 9618.13,1625 9683.09,1560.04 9736.91,1560.04 9774.96,1598.09 9774.96,1651.91 9770.28,1656.59 9770.28,2070 9905,2204.73 10278.75,2204.73 10422.71,2348.68 10422.71,2451.39 10377.43,2496.67 10377.43,3549.23 10378.43,3550.23 10378.43,3813.64 10338.64,3853.43 10046.57,3853.43 9955.78,3944.23 9955.78,4221.76 9437.1,4740.43 9344.57,4740.43 9259.13,4655 9259.13,4065.87 9368.54,3956.46 ; 9613.7,2656.85 9525.24,2600.24 ; 9621.98,2531.7 9599.5,2442.95 ; 9627.66,2232.66 ccw(c9610.32,2250) 9634.84,2250 ; 9629.69,1625 ccw(c9657.58,1625) 9637.85,1605.28 ; 9640.33,2263.82 9578.9,2183.9 ; 9655,2250 9578.9,2183.9 ; 9666.63,2233.54 9578.9,2183.9 ; 9685.55,2939.45 9685.55,3042.51 9685.28,3042.78 9685.28,3070.28 9925,3310 10145,3310 10305.5,3470.5 10305.5,3625.5 ; 9696.08,1638.92 ccw(c9626.26,1708.74) 9725,1708.74 ; 9724.84,2875 ccw(c9676.18,2875) 9710.59,2909.41 ccw(c9745,2943.82) 9745,2895.16 ; 9725,1661.21 cw(c9673.79,1661.21) 9710,1625 9725,1640 9725,2645.07 9640,2730.07 9640,2800.97 9640.28,2801.25 9640.28,3023.76 9640,3024.03 9640,3095 9905.5,3360.5 9905.5,3625.5 9842.57,3688.43 ; 9729.14,2862.56 9685.55,2934.45 ; 9732.23,2859.4 9816.76,2803.24 9760.6,2887.77 ; 9745,2854.84 cw(c9745,2806.18) 9779.41,2840.59 cw(c9813.82,2875) 9765.16,2875 ; 9746.67,3065.13 9788.86,3088.86 ; 9755,3055 9788.86,3088.86 ; 9757.44,2890.86 9685.55,2934.45 ; 9760,3050 9788.86,3088.86 ; 9760,3070.16 ccw(c9760,3094.68) 9777.34,3077.34 ; 9778.33,3041.62 9788.86,3088.86 ; 9779.97,3052.71 cw(c9828.44,3059.28) 9793.86,3093.86 ; 9835,2250 10260,2250 10377.43,2367.43 10377.43,2432.64 10309.5,2500.57 ; 9849.25,2235.75 cw(c9883.66,2201.34) 9883.66,2250 cw(c9883.66,2298.67) 9849.25,2264.25 ; 9882.84,3625.5 ccw(c9828.14,3625.5) 9866.82,3664.18 ccw(c9905.5,3702.86) 9905.5,3648.16 ; 9882.99,3074.61 ccw(c9848.58,3040.2) 9848.58,3088.86 ccw(c9848.58,3137.52) 9882.99,3103.11 ; 9883.02,3622.7 9905.5,3533.95 9927.98,3622.7 ; 9887.02,2407.3 9909.5,2496.06 9931.98,2407.3 ; 9887.02,2561.7 9909.5,2472.95 9931.98,2561.7 ; 9887.02,2567.3 9909.5,2656.06 9931.98,2567.3 ; 9887.57,3611.65 9842.57,3688.43 ; 9888.02,3788.3 9910.5,3877.06 9932.98,3788.3 ; 9889.48,3609.48 cw(c9850.8,3570.8) 9905.5,3570.8 cw(c9960.2,3570.8) 9921.52,3609.48 ; 9893.48,2420.52 ccw(c9854.8,2459.2) 9909.5,2459.2 ccw(c9964.2,2459.2) 9925.52,2420.52 ; 9893.48,2548.48 cw(c9854.8,2509.8) 9909.5,2509.8 cw(c9964.2,2509.8) 9925.52,2548.48 ; 9893.48,2580.52 ccw(c9854.8,2619.2) 9909.5,2619.2 ccw(c9964.2,2619.2) 9925.52,2580.52 ; 9894.48,3801.52 ccw(c9855.8,3840.2) 9910.5,3840.2 ccw(c9965.2,3840.2) 9926.52,3801.52 ; 9894.96,3068.83 9808.19,3088.86 9894.96,3108.89 ; 9897.24,2988.86 10136.14,2988.86 10154,2971 10154,2560 10309.5,2404.5 ; 9897.26,3068.7 9988.33,3078.86 ; 9899.53,2968.83 9986.3,2988.86 9899.53,3008.89 ; 9901.63,3108.53 9988.33,3078.86 ; 9909.5,2404.5 9909.5,2564.5 9909.5,2710.5 9745,2875 9685.55,2934.45 ; 9911.5,2974.61 cw(c9945.91,2940.2) 9945.91,2988.86 cw(c9945.91,3037.52) 9911.5,3003.11 ; 9911.5,3103.11 ccw(c9970.05,3161.67) 9970.05,3078.86 ; 9919.35,3643.43 9842.57,3688.43 ; 10272.06,2973.31 10309.5,2880.82 ; 10277.03,2964.94 cw(c10198.63,2886.54) 10309.5,2886.54 ; 10277.03,3064.94 ccw(c10243.42,3031.34) 10243.42,3078.86 ccw(c10243.42,3126.38) 10277.03,3092.78 ; 10283.02,3622.7 10305.5,3533.95 10327.98,3622.7 ; 10283.2,3629.51 10310.5,3717.34 ; 10286.84,2404.5 ccw(c10232.14,2404.5) 10270.82,2443.18 ccw(c10309.5,2481.86) 10309.5,2427.16 ; 10287.02,2567.3 10309.5,2656.06 10331.98,2567.3 ; 10287.2,2560.49 10309.5,2500.57 ; 10288.02,3782.7 10310.5,3693.95 ; 10288.76,3059.3 10202.36,3078.86 10288.76,3098.42 ; 10289.48,3609.48 cw(c10250.8,3570.8) 10305.5,3570.8 cw(c10360.2,3570.8) 10321.52,3609.48 ; 10289.48,3641.52 ccw(c10238.73,3692.27) 10310.5,3692.27 ; 10290.94,3078.86 9907.24,3078.86 9897.24,3088.86 ; 10291.84,2390.3 10235.24,2478.76 10323.7,2422.16 ; 10293.48,2548.48 cw(c10254.8,2509.8) 10309.5,2509.8 cw(c10364.2,2509.8) 10325.52,2548.48 ; 10293.48,2580.52 ccw(c10254.8,2619.2) 10309.5,2619.2 ccw(c10364.2,2619.2) 10325.52,2580.52 ; 10294.48,3769.48 cw(c10255.8,3730.8) 10310.5,3730.8 cw(c10365.2,3730.8) 10326.52,3769.48 ; 10309.5,2934.06 ccw(c10246.15,2934.06) 10290.94,2978.86 ; 10310.5,3668.13 ccw(c10348.13,3668.13) 10321.52,3641.52 ; 10310.55,2980.59 10309.5,2880.82 ; 10328.1,3627.07 10310.5,3717.34 ; 10331.8,2560.49 10309.5,2500.57 ; 10332.98,3782.7 10310.5,3693.95 ; 6315.5,2515.5 6402.82,2577.82 ; 7004.5,1705.36 7015,1615 7015,1605.84 7004.5,1616.34 7004.5,2524.5 ; 7119.91,4000.09 7173.54,3911.26 ; 7121.84,1704.25 7115,1615 7121.84,1621.84 7121.84,1770 7230.43,1878.59 7230.43,1887.76 7230.43,2130.43 7404.5,2304.5 7404.5,2524.5 7404.5,2432.95 ; 7140.43,1978.42 7130.43,1887.76 7140.43,1897.76 7140.43,2281.46 7210,2351.03 7210,2620 7400,2810 7400,2995 ; 7173.54,3823.54 7173.54,3911.26 ; 7173.54,3911.26 7173.54,3946.46 ; 7173.54,3911.26 7173.54,3946.46 ; 7173.54,3946.46 7192.44,3916.77 7173.54,3946.46 ; 7173.54,3946.46 7154.64,3916.77 7173.54,3946.46 ; 7215,4475.95 7215,4565 7215,4335 7275,4275 ; 7240.43,2281.46 7240.43,2317.43 ; 7240.43,2281.46 7255.28,2332.27 ; 7240.43,2281.46 7240.43,2317.43 ; 7240.43,2317.43 7259.78,2287.11 7240.43,2317.43 ; 7240.43,2317.43 7221.08,2287.11 7240.43,2317.43 ; 7240.43,2317.43 7255.28,2332.27 ; 7255.28,2332.27 7255.28,2515.28 7404.5,2664.5 7330.24,2590.24 ; 7273.54,3911.26 7285.43,3820.7 ; 7273.54,3911.26 7285.43,4001.76 ; 7275,4275 7275,4228.66 7285.43,4138.86 ; 7365,3045 7400,2995 ; 7593.86,3078.86 7702.24,3078.86 ; 7702.24,3078.86 7793.33,3068.86 ; 8095.94,2968.86 8114.5,2870.82 ; 8095.94,2968.86 8114.5,2950.3 8114.5,2554.5 ; 8110.5,3615.5 8115.5,3707.34 ; 8110.5,3615.5 8115.5,3620.5 8115.5,3775.5 8115.5,3683.95 ; 8114.5,2490.57 8114.5,2554.5 ; 8114.5,2490.57 8114.5,2554.5 ; 8510.5,2525.5 8597.82,2587.82 ; 9199.5,1715.36 9210,1625 9210,1615.84 9199.5,1626.34 9199.5,2534.5 ; 9314.91,4010.09 9368.54,3921.26 ; 9316.84,1714.25 9310,1625 9316.84,1631.84 9316.84,1780 9425.43,1888.59 9425.43,1897.76 9425.43,2140.43 9599.5,2314.5 9599.5,2534.5 9599.5,2442.95 ; 9335.43,1988.42 9325.43,1897.76 9335.43,1907.76 9335.43,2291.46 9405,2361.03 9405,2630 9595,2820 9595,3005 ; 9368.54,3833.54 9368.54,3921.26 ; 9368.54,3921.26 9368.54,3956.46 ; 9368.54,3921.26 9368.54,3956.46 ; 9368.54,3956.46 9387.44,3926.77 9368.54,3956.46 ; 9368.54,3956.46 9349.64,3926.77 9368.54,3956.46 ; 9410,4485.95 9410,4575 9410,4345 9470,4285 ; 9435.43,2291.46 9435.43,2327.43 ; 9435.43,2291.46 9450.28,2342.27 ; 9435.43,2291.46 9435.43,2327.43 ; 9435.43,2327.43 9454.78,2297.11 9435.43,2327.43 ; 9435.43,2327.43 9416.08,2297.11 9435.43,2327.43 ; 9435.43,2327.43 9450.28,2342.27 ; 9450.28,2342.27 9450.28,2525.28 9599.5,2674.5 9525.24,2600.24 ; 9468.54,3921.26 9480.43,3830.7 ; 9468.54,3921.26 9480.43,4011.76 ; 9470,4285 9470,4238.66 9480.43,4148.86 ; 9560,3055 9595,3005 ; 9788.86,3088.86 9897.24,3088.86 ; 9897.24,3088.86 9988.33,3078.86 ; 10290.94,2978.86 10309.5,2880.82 ; 10290.94,2978.86 10309.5,2960.3 10309.5,2564.5 ; 10305.5,3625.5 10310.5,3717.34 ; 10305.5,3625.5 10310.5,3630.5 10310.5,3785.5 10310.5,3693.95 ; 10309.5,2500.57 10309.5,2564.5 ; 10309.5,2500.57 10309.5,2564.5
  Bottom Layer w20.32: 2918.98,2803.54 2945,2897.36 2971.02,2803.54 ; 2918.98,4113.54 2945,4207.36 2971.02,4113.54 ; 2924.66,2816.6 ccw(c2849.11,2878.25) 2943.07,2904.31 ; 2924.66,4126.6 ccw(c2849.11,4188.25) 2943.07,4214.31 ; 2926.43,2818.57 ccw(c2881.6,2863.4) 2945,2863.4 ccw(c3008.4,2863.4) 2963.57,2818.57 ; 2926.43,4128.57 ccw(c2881.6,4173.4) 2945,4173.4 ccw(c3008.4,4173.4) 2963.57,4128.57 ; 2940.39,2803.76 ccw(c2886.37,2847.85) 2953.56,2866.48 ; 2940.39,4113.76 ccw(c2886.37,4157.85) 2953.56,4176.48 ; 2945,2600 3345,2600 3745,2600 4145,2600 ; 2945,2800 2945,2975 3090,3120 3325,3120 ; 2945,3910 3345,3910 3745,3910 4145,3910 ; 2945,4110 2945,4285 3090,4430 3325,4430 ; 2948.54,2573.98 3042.36,2600 2948.54,2626.02 ; 2948.54,3883.98 3042.36,3910 2948.54,3936.02 ; 2948.76,2595.39 cw(c2992.85,2541.37) 3011.48,2608.56 ; 2948.76,3905.39 cw(c2992.85,3851.37) 3011.48,3918.56 ; 2961.6,2579.66 cw(c3023.25,2504.11) 3049.31,2598.07 ; 2961.6,3889.66 cw(c3023.25,3814.11) 3049.31,3908.07 ; 2963.57,2581.43 cw(c3008.4,2536.6) 3008.4,2600 cw(c3008.4,2663.4) 2963.57,2618.57 ; 2963.57,3891.43 cw(c3008.4,3846.6) 3008.4,3910 cw(c3008.4,3973.4) 2963.57,3928.57 ; 3230.43,3119.11 cw(c3254.04,3010.74) 3314.45,3103.76 ; 3230.43,4429.11 cw(c3254.04,4320.74) 3314.45,4413.76 ; 3240.69,2598.07 cw(c3266.75,2504.11) 3328.4,2579.66 ; 3240.69,3908.07 cw(c3266.75,3814.11) 3328.4,3889.66 ; 3278.01,3129.47 cw(c3291.36,3068.2) 3325.51,3120.79 ; 3278.01,4439.47 cw(c3291.36,4378.2) 3325.51,4430.79 ; 3278.52,2608.56 cw(c3297.15,2541.37) 3341.24,2595.39 ; 3278.52,3918.56 cw(c3297.15,3851.37) 3341.24,3905.39 ; 3311.3,3106.3 ccw(c3278.24,3073.24) 3278.24,3120 ccw(c3278.24,3166.76) 3311.3,3133.7 ; 3311.3,4416.3 ccw(c3278.24,4383.24) 3278.24,4430 ccw(c3278.24,4476.76) 3311.3,4443.7 ; 3319.15,2804.6 3345,2875 ; 3319.15,4114.6 3345,4185 ; 3322.93,3100.74 3234.53,3120 3322.93,3139.26 ; 3322.93,4410.74 3234.53,4430 3322.93,4449.26 ; 3326.43,2581.43 ccw(c3281.6,2536.6) 3281.6,2600 ccw(c3281.6,2663.4) 3326.43,2618.57 ; 3326.43,2818.57 ccw(c3281.6,2863.4) 3345,2863.4 ccw(c3408.4,2863.4) 3363.57,2818.57 ; 3326.43,3891.43 ccw(c3281.6,3846.6) 3281.6,3910 ccw(c3281.6,3973.4) 3326.43,3928.57 ; 3326.43,4128.57 ccw(c3281.6,4173.4) 3345,4173.4 ccw(c3408.4,4173.4) 3363.57,4128.57 ; 3326.78,2818.91 ccw(c3284.43,2862.87) 3341.73,2883.91 ; 3326.78,4128.91 ccw(c3284.43,4172.87) 3341.73,4193.91 ; 3340.88,2804.28 ccw(c3308.04,2838.36) 3352.46,2854.67 ; 3340.88,4114.28 ccw(c3308.04,4148.36) 3352.46,4164.67 ; 3341.46,2573.98 3247.64,2600 3341.46,2626.02 ; 3341.46,3883.98 3247.64,3910 3341.46,3936.02 ; 3345,2800 3345,2875 ; 3345,4110 3345,4185 ; 3348.54,2573.98 3442.36,2600 3348.54,2626.02 ; 3348.54,3883.98 3442.36,3910 3348.54,3936.02 ; 3348.76,2595.39 cw(c3392.85,2541.37) 3411.48,2608.56 ; 3348.76,3905.39 cw(c3392.85,3851.37) 3411.48,3918.56 ; 3361.6,2579.66 cw(c3423.25,2504.11) 3449.31,2598.07 ; 3361.6,3889.66 cw(c3423.25,3814.11) 3449.31,3908.07 ; 3363.57,2581.43 cw(c3408.4,2536.6) 3408.4,2600 cw(c3408.4,2663.4) 3363.57,2618.57 ; 3363.57,3891.43 cw(c3408.4,3846.6) 3408.4,3910 cw(c3408.4,3973.4) 3363.57,3928.57 ; 3370.85,2804.6 3345,2875 ; 3370.85,4114.6 3345,4185 ; 3405.74,3117.93 3425,3029.53 3444.26,3117.93 ; 3405.74,4427.93 3425,4339.53 3444.26,4427.93 ; 3411.3,3106.3 cw(c3378.24,3073.24) 3425,3073.24 cw(c3471.76,3073.24) 3438.7,3106.3 ; 3411.3,4416.3 cw(c3378.24,4383.24) 3425,4383.24 cw(c3471.76,4383.24) 3438.7,4416.3 ; 3425,3120 3425,2955 3345,2875 ; 3425,4430 3425,4265 3345,4185 ; 3505.74,3117.93 3525,3029.53 3544.26,3117.93 ; 3505.74,4427.93 3525,4339.53 3544.26,4427.93 ; 3511.3,3106.3 cw(c3478.24,3073.24) 3525,3073.24 cw(c3571.76,3073.24) 3538.7,3106.3 ; 3511.3,4416.3 cw(c3478.24,4383.24) 3525,4383.24 cw(c3571.76,4383.24) 3538.7,4416.3 ; 3525,3120 3525,2925 3650,2800 ; 3525,4430 3525,4235 3650,4110 ; 3605.74,3117.92 3625,3030 ; 3605.74,4427.92 3625,4340 ; 3611.3,3106.3 cw(c3578.24,3073.24) 3625,3073.24 cw(c3671.76,3073.24) 3638.7,3106.3 ; 3611.3,4416.3 cw(c3578.24,4383.24) 3625,4383.24 cw(c3671.76,4383.24) 3638.7,4416.3 ; 3625,3120 3625,3030 ; 3625,4430 3625,4340 ; 3640.69,2598.07 cw(c3666.75,2504.11) 3728.4,2579.66 ; 3640.69,3908.07 cw(c3666.75,3814.11) 3728.4,3889.66 ; 3642.88,2797.97 cw(c3668.4,2708.34) 3728.16,2779.85 ; 3642.88,4107.97 cw(c3668.4,4018.34) 3728.16,4089.85 ; 3644.26,3117.92 3625,3030 ; 3644.26,4427.92 3625,4340 ; 3678.52,2608.56 cw(c3697.15,2541.37) 3741.24,2595.39 ; 3678.52,3918.56 cw(c3697.15,3851.37) 3741.24,3905.39 ; 3679.81,2808.48 cw(c3698.17,2743.97) 3741.19,2795.44 ; 3679.81,4118.48 cw(c3698.17,4053.97) 3741.19,4105.44 ; 3713.55,3104.38 3770,3075 ; 3713.55,4414.38 3770,4385 ; 3724.08,3120.19 ccw(c3749.35,3114.87) 3737.43,3091.95 ; 3724.08,4430.19 ccw(c3749.35,4424.87) 3737.43,4401.95 ; 3725,3100.63 cw(c3725,3053.87) 3758.07,3086.93 cw(c3791.13,3120) 3744.37,3120 ; 3725,3120 3770,3075 ; 3725,4410.63 cw(c3725,4363.87) 3758.07,4396.93 cw(c3791.13,4430) 3744.37,4430 ; 3725,4430 3770,4385 ; 3725.28,3120.9 cw(c3706.31,3060.74) 3762.27,3089.86 ; 3725.28,4430.9 cw(c3706.31,4370.74) 3762.27,4399.86 ; 3726.43,2581.43 ccw(c3681.6,2536.6) 3681.6,2600 ccw(c3681.6,2663.4) 3726.43,2618.57 ; 3726.43,2781.43 ccw(c3681.6,2736.6) 3681.6,2800 ccw(c3681.6,2863.4) 3726.43,2818.57 ; 3726.43,3891.43 ccw(c3681.6,3846.6) 3681.6,3910 ccw(c3681.6,3973.4) 3726.43,3928.57 ; 3726.43,4091.43 ccw(c3681.6,4046.6) 3681.6,4110 ccw(c3681.6,4173.4) 3726.43,4128.57 ; 3740.62,3131.45 3770,3075 ; 3740.62,4441.45 3770,4385 ; 3741.37,2773.99 3650,2800 ; 3741.37,2826.01 3650,2800 ; 3741.37,4083.99 3650,4110 ; 3741.37,4136.01 3650,4110 ; 3741.46,2573.98 3647.64,2600 3741.46,2626.02 ; 3741.46,3883.98 3647.64,3910 3741.46,3936.02 ; 3743.95,3116 ccw(c3776.53,3109.13) 3761.16,3079.6 ; 3743.95,4426 ccw(c3776.53,4419.13) 3761.16,4389.6 ; 3745,2800 3650,2800 ; 3745,4110 3650,4110 ; 3748.54,2573.98 3842.36,2600 3748.54,2626.02 ; 3748.54,3883.98 3842.36,3910 3748.54,3936.02 ; 3748.76,2595.39 cw(c3792.85,2541.37) 3811.48,2608.56 ; 3748.76,3905.39 cw(c3792.85,3851.37) 3811.48,3918.56 ; 3761.6,2579.66 cw(c3823.25,2504.11) 3849.31,2598.07 ; 3761.6,3889.66 cw(c3823.25,3814.11) 3849.31,3908.07 ; 3763.57,2581.43 cw(c3808.4,2536.6) 3808.4,2600 cw(c3808.4,2663.4) 3763.57,2618.57 ; 3763.57,3891.43 cw(c3808.4,3846.6) 3808.4,3910 cw(c3808.4,3973.4) 3763.57,3928.57 ; 4040.69,2598.07 cw(c4066.75,2504.11) 4128.4,2579.66 ; 4040.69,3908.07 cw(c4066.75,3814.11) 4128.4,3889.66 ; 4073.89,2865.85 ccw(c4144.71,2909.4) 4144.93,2826.26 ; 4073.89,4175.85 ccw(c4144.71,4219.4) 4144.93,4136.26 ; 4078.52,2608.56 cw(c4097.15,2541.37) 4141.24,2595.39 ; 4078.52,3918.56 cw(c4097.15,3851.37) 4141.24,3905.39 ; 4092.8,2862.72 cw(c4038.64,2774.64) 4139.22,2798.62 ; 4092.8,4172.72 cw(c4038.64,4084.64) 4139.22,4108.62 ; 4092.87,2834.99 ccw(c4144.82,2866.94) 4144.98,2805.94 ; 4092.87,4144.99 ccw(c4144.82,4176.94) 4144.98,4115.94 ; 4118.74,2800 ccw(c4055.34,2800) 4100.17,2844.83 ccw(c4145,2889.66) 4145,2826.26 ; 4118.74,4110 ccw(c4055.34,4110) 4100.17,4154.83 ccw(c4145,4199.66) 4145,4136.26 ; 4124.39,2783.73 4065.49,2879.51 4161.27,2820.61 ; 4124.39,4093.73 4065.49,4189.51 4161.27,4130.61 ; 4126.43,2581.43 ccw(c4081.6,2536.6) 4081.6,2600 ccw(c4081.6,2663.4) 4126.43,2618.57 ; 4126.43,3891.43 ccw(c4081.6,3846.6) 4081.6,3910 ccw(c4081.6,3973.4) 4126.43,3928.57 ; 4132.08,2606.28 cw(c4180.96,2582.52) 4163.2,2633.89 ; 4132.08,3916.28 cw(c4180.96,3892.52) 4163.2,3943.89 ; 4133.6,2623.66 4240.68,2660.68 ; 4133.6,3933.66 4240.68,3970.68 ; 4134.58,2837.02 cw(c4106.11,2790.73) 4158.98,2803.33 ; 4134.58,4147.02 cw(c4106.11,4100.73) 4158.98,4113.33 ; 4141.46,2573.98 4047.64,2600 4141.46,2626.02 ; 4141.46,3883.98 4047.64,3910 4141.46,3936.02 ; 4145,2605.94 ccw(c4145,2704.79) 4214.9,2634.9 ; 4145,2626.26 ccw(c4145,2774.15) 4249.58,2669.58 ; 4145,2800 4015,2930 3725,2930 3625,3030 ; 4145,3915.94 ccw(c4145,4014.79) 4214.9,3944.9 ; 4145,3936.26 ccw(c4145,4084.15) 4249.58,3979.58 ; 4145,4110 4015,4240 3725,4240 3625,4340 ; 4145.5,2605.92 ccw(c4152.43,2687.56) 4211.06,2630.33 ; 4145.5,3915.92 ccw(c4152.43,3997.56) 4211.06,3940.33 ; 4147.22,2626.17 ccw(c4157.14,2743.1) 4241.12,2661.13 ; 4147.22,3936.17 ccw(c4157.14,4053.1) 4241.12,3971.13 ; 4150.35,2597.4 cw(c4243.34,2552.19) 4209.55,2649.92 ; 4150.35,3907.4 cw(c4243.34,3862.19) 4209.55,3959.92 ; 4150.74,2625.63 ccw(c4164.58,2687.49) 4198.54,2633.95 ccw(c4232.49,2580.42) 4170.63,2594.26 ; 4150.74,3935.63 ccw(c4164.58,3997.49) 4198.54,3943.95 ccw(c4232.49,3890.42) 4170.63,3904.26 ; 4161.54,2579.6 4240.68,2660.68 ; 4161.54,3889.6 4240.68,3970.68 ; 3770,3075 4110,3075 4255,2930 4255,2675 4180,2600 4145,2600 ; 3770,4385 4110,4385 4255,4240 4255,3985 4180,3910 4145,3910 ; 4145,2600 4240.68,2660.68 ; 4145,3910 4240.68,3970.68